# Altium PCB IntelliModule-Alpha.PcbDoc (part 2 of 2)
Units mm, origin at the board's own origin, x right, y up, seen from the top; angles counter-clockwise.
Board outline 30 x 26.8 mm, 4 copper layers (Top Layer, Layer 1, Layer 2, Bottom Layer), stack 1.006 mm thick; 64 components, 69 nets, 256 pads, 140 vias.
Unrouted connection lines stored in the file: 2.
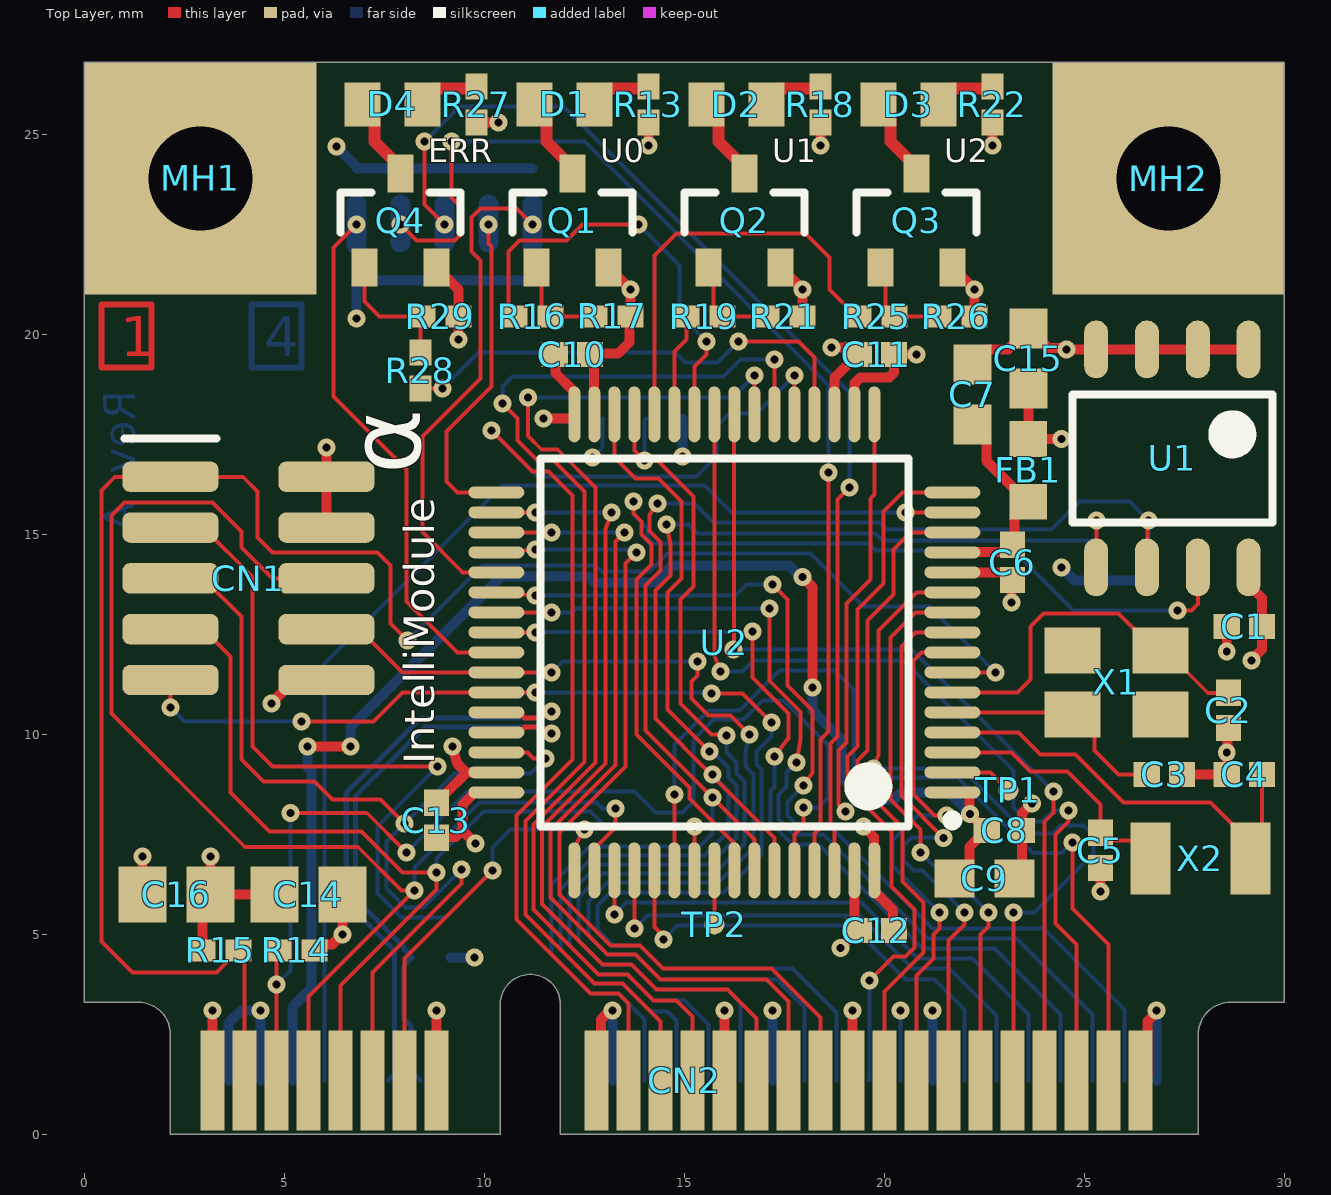
[diagram p0: Top Layer view]

## Via types
v1: diameter 0.45, hole 0.2, Top Layer to Bottom Layer, tented both sides, 140 vias

## Nets (pads, with @x,y where several pads share a name; then routed paths per layer and width w, separated by ;. In a path a pad name is that pad's centre, name@x,y a point inside that pad or via, vN(x,y) a via of type N, cw(c..) or ccw(c..) an arc to the next point about the centre after c; other vN are vias at no path point) (continued)
GND: (continued)
  Top Layer w0.25: C16.2 v1(1.45,6.95) ; CN2.1 v1(3.2,3.1) ; R14.1 5.8,4.6 5.95,4.75 6.2,4.75 v1(6.45,5) C14.2 ; CN1.4 CN1.2 v1(6.05,17.175) ; CN2.15 v1(8.8,3.1) ; C13.2 8.8,8.31 8.985,8.495 9.005,8.495 9.55,9.04 ; Q4.2 9.35,21.125 R29.2 v1(9.35,19.875) ; v1(9.2,9.7) 9.325,9.266 9.55,9.04 ; U2.47 9.55,9.04 ; C10.2 12.74,19.4 12.74,18.01 U2.31 ; C10.2@12.66,19.52 13.345,19.52 13.625,19.8 13.625,20.426 R17.2 v1(13.65,21.125) Q1.2 ; CN2.17 12.8,1.875 12.921,1.996 12.921,2.875 13.146,3.1 v1(13.2,3.1) ; CN2.25 v1(16,3.1) ; Q2.2 v1(17.95,21.125) R21.2 ; v1(18.9,4.66) 19.34,5.1 C12.2 19.26,5.2 19.26,6.59 U2.63 ; CN2.33 v1(19.2,3.1) ; U2.18 19.26,18.01 19.26,18.779 19.406,18.925 20.125,18.925 20.24,19.04 C11.2 v1(20.805,19.5) ; U2.12 21.71,14.04 23.02,14.04 C6.2 23.175,13.835 v1(23.175,13.3) ; Q3.2 v1(22.25,21.125) R26.2 ; C7.2 22.2,19.275 22.55,19.625 23.1,19.625 C15.2@23.6,20.125 ; C9.2 23.44,6.59 C8.2 23.44,8.025 v1(23.69,8.275) ; C15.2 C15.2@23.6,20.125 ; v1(25.4,6.075) C5.2 ; CN2.51 26.575,1.525 26.575,2.821 26.8,3.046 v1(26.8,3.1) ; C3.2 C4.2 v1(28.56,9.55) 28.58,9.57 28.58,10.14 C2.2 ; v1(28.56,12.075) C1.2 ; U1.1 U1.2 U1.3 U1.4 v1(24.55,19.625) 24.512,19.663 24.087,19.663 23.975,19.775 23.95,19.775 C15.2@23.6,20.125
  Bottom Layer w0.25: v1(6.3,24.7) 6.8,24.2 R8.2 R9.2 R10.2 R11.2 R12.2 ; CN2.18 v1(13.2,3.1) ; CN2.28 v1(17.2,3.1) ; CN2.38 v1(21.2,3.1) ; CN2.52 v1(26.8,3.1)
MCU_BOOT0: CN2.5 R14.2 U2.60 | length 28.6
  Top Layer w0.1: CN2.5 4.8,4.55 R14.2 ; v1(5.15,8.04) 7.06,8.04 v1(8.05,7.05) ; U2.60 17.75,7.5 17.975,7.725 v1(17.975,8.175)
  Bottom Layer w0.1: v1(4.8,3.75) 5.15,4.1 v1(5.15,8.04) ; v1(8.05,7.05) 9.575,8.575 13.75,8.575 14.275,8.05 14.95,8.05 15.225,8.325 15.225,9.875 15.725,10.375 16.475,10.375 16.95,10.85 17.475,10.85 18.6,9.725 18.6,8.425 18.35,8.175 v1(17.975,8.175)
MCU_PA0_GPIO0: CN2.35 U2.14 | length 16.4
  Top Layer w0.1: CN2.35 20,3.575 20.975,4.55 20.975,5.8 20.45,6.325 20.45,7.675 19.325,8.8 19.325,9.35 19.575,9.6 19.575,12.85 20.225,13.5 20.225,14.625 20.65,15.05 U2.14
MCU_PA1_AUX1: CN2.8 U2.15 | length 28.2
  Top Layer w0.1: v1(20.525,15.55) U2.15
  Bottom Layer w0.1: CN2.8 6,11.775 10.45,16.225 15.501,16.225 16.176,15.55 v1(20.525,15.55)
MCU_PA2_USART2_TX: CN2.34 U2.16 | length 17.9
  Top Layer w0.1: v1(19.625,3.85) 20.225,4.45 20.525,4.45 20.75,4.675 20.75,5.625 20.175,6.2 20.175,7.575 19.075,8.675 19.075,9.45 19.325,9.7 19.325,13.125 19.975,13.775 19.975,15.575 20.45,16.05 U2.16
  Bottom Layer w0.1: CN2.34 19.625,1.375 v1(19.625,3.85)
MCU_PA3_USART2_RX: CN2.36 U2.17 | length 19
  Top Layer w0.1: v1(19.025,8.075) 18.85,8.25 18.85,9.6 19.05,9.8 19.05,13.275 19.65,13.875 19.65,15.9 19.75,16 U2.17
  Layer 1 w0.1: v1(19.025,8.075) 19.3,8.35 19.875,8.35 20.2,8.025 20.2,7.475 20,7.275 20,5.675 20.7,4.975 20.7,4.225 20.4,3.925 v1(20.4,3.1)
  Bottom Layer w0.1: CN2.36 v1(20.4,3.1)
MCU_PA4_ERRORLED: R28.1 U2.20 | length 12.1
  Top Layer w0.1: R28.1 v1(8.95,18.65) ; v1(16.35,19.825) 17.85,19.825 18.25,19.425 U2.20
  Bottom Layer w0.1: v1(8.95,18.65) 9.85,19.55 14.775,19.55 15.025,19.3 15.825,19.3 v1(16.35,19.825)
MCU_PA5_SPI1_SCK: CN2.19 U2.21 | length 30
  Top Layer w0.1: v1(10.175,17.6) 11.208,16.567 11.608,16.567 12.2,15.975 12.2,9.375 10.8,7.975 10.8,5.375 12.65,3.525 13.35,3.525 13.6,3.275 CN2.19 ; U2.21 v1(17.75,18.975)
  Bottom Layer w0.1: v1(10.175,17.6) 11.325,16.45 15.3,16.45 15.8,16.95 15.8,17.7 16.125,18.025 16.8,18.025 v1(17.75,18.975)
MCU_PA6_SPI1_MISO: CN2.21 U2.22 | length 29.3
  Top Layer w0.1: v1(10.45,18.275) 10.825,17.9 10.825,17.35 11.325,16.85 11.725,16.85 12.5,16.075 12.5,9.306 11.025,7.831 11.025,5.5 12.75,3.775 13.45,3.775 14.4,2.825 CN2.21 ; U2.22 v1(17.25,19.375)
  Bottom Layer w0.1: v1(10.45,18.275) 10.45,18.7 10.7,18.95 15.975,18.95 16.4,19.375 v1(17.25,19.375)
MCU_PA7_SPI1_MOSI: CN2.23 U2.23 | length 27.9
  Top Layer w0.1: v1(11.087,18.425) 11.087,17.462 11.435,17.115 11.835,17.115 12.775,16.175 12.775,9.299 11.225,7.749 11.225,5.625 12.85,4 13.575,4 14.225,3.35 14.8,3.35 15.2,2.95 CN2.23 ; U2.23 v1(16.75,18.975)
  Bottom Layer w0.1: v1(11.087,18.425) 16.2,18.425 v1(16.75,18.975)
MCU_PA8_HWBIT0: R3.2 R8.1 U2.41 | length 14.2
  Top Layer w0.1: v1(6.8,22.75) 6.225,22.175 6.225,18.445 8.05,16.62 8.05,13.325 9.325,12.05 U2.41
  Bottom Layer w0.5: R3.2 v1(6.8,22.75) R8.1
MCU_PA9_USART1_TX: CN1.8 CN2.30 U2.42 | length 29.1
  Top Layer w0.1: CN1.8 6.87,12.63 7.95,11.55 U2.42 v1(11.675,11.55) ; v1(15.325,11.825) 15.325,11.475 15.175,11.325 15.175,10.9 15.6,10.475 16.15,10.475 v1(16.625,10)
  Bottom Layer w0.1: v1(11.675,11.55) 11.95,11.825 v1(15.325,11.825) ; v1(16.625,10) 16.525,9.575 16.525,9.2 16.725,9 16.725,7.175 15.85,6.3 13.075,6.3 12.6,5.825 12.6,4.975 13.075,4.5 13.775,4.5 14.4,3.875 17.3,3.875 18,3.175 CN2.30
MCU_PA10_USART1_RX: CN1.9 CN2.32 U2.43 | length 33.7
  Top Layer w0.1: v1(2.15,10.675) CN1.9 ; v1(5.425,10.325) 7.225,10.325 7.95,11.05 U2.43 v1(11.275,11.05) ; v1(15.676,11.026) 16.449,11.026 v1(17.175,10.3)
  Bottom Layer w0.1: v1(2.15,10.675) 2.5,10.325 v1(5.425,10.325) ; v1(11.275,11.05) 15.651,11.05 v1(15.676,11.026) ; v1(17.175,10.3) 17.175,9.95 16.8,9.575 16.8,9.25 16.925,9.125 16.925,7 15.975,6.05 13.15,6.05 12.825,5.725 12.825,5.125 13.225,4.725 13.896,4.725 14.471,4.15 17.7,4.15 18.8,3.05 CN2.32
MCU_PA13_JTAG_TMS_SWDIO: CN1.5 CN2.11 U2.46 | length 26.4
  Top Layer w0.1: CN1.5 2.97,13.9 3.925,12.945 3.925,9.375 4.475,8.825 5.75,8.825 6.199,8.376 7.399,8.376 v1(8,7.775) ; CN2.11 7.2,4.05 9.425,6.275 v1(9.425,6.625) ; U2.46 11.075,9.55 11.225,9.4 v1(11.525,9.4)
  Bottom Layer w0.1: v1(9.425,6.625) 8.475,5.675 8.025,5.675 7.55,6.15 7.55,7.325 v1(8,7.775) 9.25,9.025 11.15,9.025 v1(11.525,9.4)
MCU_PA14_JTAG_TCK_SWCLK: CN1.3 CN2.13 U2.49 | length 28.8
  Top Layer w0.1: CN1.3 2.97,15.17 4.2,13.94 4.2,9.7 4.7,9.2 v1(8.825,9.2) ; CN2.13 8,4.4 v1(10.2,6.6) ; U2.49@12.25,7.175 v1(12.5,7.625)
  Bottom Layer w0.1: v1(8.825,9.2) 7.325,7.7 7.325,6.025 7.925,5.425 9.025,5.425 v1(10.2,6.6) 10.2,7.175 10.65,7.625 v1(12.5,7.625)
MCU_PA15_JTAG_TDI: CN1.6 CN2.7 U2.50 | length 34.8
  Top Layer w0.1: CN2.7 5.6,3.45 v1(8.25,6.1) 7.925,6.1 6.835,7.19 4.01,7.19 0.675,10.525 0.675,15.475 1,15.8 3.201,15.8 3.925,15.076 3.925,14.675 4.7,13.9 CN1.6 ; U2.50 12.75,7.15 13.275,7.675 v1(13.275,8.15)
  Bottom Layer w0.1: v1(8.25,6.1) 8.25,6.675 9.875,8.3 12.8,8.3 12.95,8.15 v1(13.275,8.15)
MCU_PB0_USERLED_0: R16.1 U2.26 | length 10.8
  Top Layer w0.1: R16.1 10.6,20.6 10.6,22.075 10.875,22.35 12.05,22.35 12.45,22.75 v1(13.85,22.75) ; U2.26 15.25,19.2 15.55,19.5 v1(15.55,19.825)
  Bottom Layer w0.1: v1(13.85,22.75) 14.875,21.725 14.875,20.5 v1(15.55,19.825)
MCU_PB1_USERLED_1: R19.1 U2.27 | length 2.6
  Top Layer w0.1: U2.27 14.75,19.575 15.05,19.875 R19.1
MCU_PB2_USERLED_2: R25.1 U2.28 | length 10.6
  Top Layer w0.1: U2.28 14.25,21.975 14.8,22.525 18.025,22.525 18.625,21.925 18.625,21.125 19.3,20.45 R25.1
MCU_PB3_JTAG_TDO_TRACE_SWO: CN1.7 CN2.9 U2.55 | length 25.9
  Top Layer w0.1: CN1.7 2.97,12.63 3.65,11.95 3.65,8.55 4.625,7.575 6.925,7.575 7.95,6.55 v1(8.8,6.55) 8.8,6.12 6.4,3.72 CN2.9 ; U2.55 v1(15.25,7.7)
  Bottom Layer w0.1: v1(8.8,6.55) 8.8,6.9 9.975,8.075 12.65,8.075 13.025,7.7 v1(15.25,7.7)
MCU_PB4_JTAG_TRSTn: TP2.1 U2.56 | length 1.4
  Top Layer w0.1: TP2.1 U2.56
MCU_PB5_EEPROM_WP: U1.7 U2.57 | length 27.1
  Top Layer w0.1: v1(13.725,15.825) 13.725,15.525 13.925,15.325 13.925,15 14.175,14.75 14.175,14.25 13.8,13.875 13.8,10 15.125,8.675 15.125,8.4 16.25,7.275 U2.57 ; v1(27.325,13.1) 27.675,13.1 27.835,13.26 U1.7
  Bottom Layer w0.1: v1(13.725,15.825) 13.725,15.5 14.075,15.15 14.075,14.925 14.225,14.775 19.6,14.775 19.775,14.6 23.225,14.6 24.725,13.1 v1(27.325,13.1)
MCU_PB6_I2C1_SCL: CN2.20 R1.2 U1.6 U2.58 | length 37.2
  Top Layer w0.1: v1(14.325,15.775) 14.125,15.48 14.125,15.083 14.4,14.808 14.4,14.1 14.025,13.725 14.025,10.1 v1(15.7,8.425) 16.75,7.375 U2.58 ; U1.6 26.582,14.192 26.582,15.332 v1(26.6,15.35)
  Bottom Layer w0.1: CN2.20 14,2.875 13.35,3.525 12.65,3.525 11.675,4.5 11.675,6.25 12.625,7.2 15.375,7.2 15.7,7.525 v1(15.7,8.425) ; v1(14.325,15.775) 15.25,15.775 15.725,15.3 19.875,15.3 20.05,15.125 24.175,15.125 24.875,15.825 26.125,15.825 v1(26.6,15.35) R1.2
MCU_PB7_I2C1_SDA: CN2.22 R2.2 U1.5 U2.59 | length 35.8
  Top Layer w0.1: v1(14.55,15.25) 14.65,14.75 14.65,13.975 14.275,13.6 14.275,10.395 15.67,9 v1(15.7,9) 15.7,8.955 17.25,7.405 U2.59 ; U1.5 25.298,14.178 25.298,15.348 v1(25.3,15.35)
  Bottom Layer w0.1: v1(14.55,15.25) 15.1,15.25 15.325,15.025 19.775,15.025 19.95,14.85 25.2,14.85 R2.2 v1(25.3,15.35) ; CN2.22 14.8,2.85 14.575,3.075 14.15,3.075 13.45,3.775 12.75,3.775 11.9,4.625 11.9,6.125 12.75,6.975 15.5,6.975 16.1,7.575 16.1,8.6 v1(15.7,9)
MCU_PB8_HWBIT1: R4.2 R9.1 U2.61 | length 29.4
  Top Layer w0.1: v1(7.9,22.75) 8.3,22.35 9.25,22.35 9.425,22.525 9.425,23.175 9.175,23.425 v1(9.175,24.825) ; U2.61 18.25,7.525 18.4,7.675 18.4,9.875 18.6,10.075 v1(18.6,16.55)
  Bottom Layer w0.1: R4.2 R4.2@7.9,22.3 ; v1(9.175,24.825) 12.5,24.825 18.6,18.725 v1(18.6,16.55)
  Bottom Layer w0.5: R4.2@7.9,22.3 R9.1
MCU_PB9_HWBIT2: R5.2 R10.1 U2.62 | length 29.4
  Top Layer w0.1: v1(8.5,24.825) 8.5,23.25 v1(9,22.75) ; U2.62 18.75,7.625 18.65,7.725 18.65,8.23 18.65,9.775 18.825,9.95 18.825,15.875 v1(19.125,16.175)
  Bottom Layer w0.1: v1(8.5,24.825) 9.375,25.7 11.975,25.7 19.125,18.55 v1(19.125,16.175) ; R5.2 R5.2@9,22.3
  Bottom Layer w0.5: R5.2@9,22.3 R10.1
MCU_PB10_I2C2_SCL: CN2.26 R24.2 U2.29 | length 26
  Top Layer w0.1: U2.29 13.75,17.1 v1(14,16.85) 14.325,16.85 15.225,15.95 15.225,13.7 14.9,13.375 14.9,10.775 15.675,10 16.025,10 v1(16.05,9.975)
  Bottom Layer w0.1: v1(14,16.85) 14,17.85 R24.2 ; v1(16.05,9.975) 16.05,9.55 16.3,9.3 16.3,9.025 16.5,8.825 16.5,7.275 15.75,6.525 12.95,6.525 12.35,5.925 12.35,4.85 12.95,4.25 13.675,4.25 14.3,3.625 16.075,3.625 16.4,3.3 CN2.26
MCU_PB11_I2C2_SDA: CN2.24 R23.2 U2.30 | length 25.9
  Top Layer w0.1: v1(12.7,16.925) 13.25,16.925 ; U2.30 13.25,16.925 ; v1(15.625,9.575) 14.575,10.625 14.575,13.55 14.925,13.9 14.925,15.825 14.35,16.4 13.775,16.4 13.25,16.925
  Bottom Layer w0.1: v1(12.7,16.925) 12.95,17.175 R23.2 ; CN2.24 15.6,2.75 15,3.35 14.225,3.35 13.575,4 12.85,4 12.125,4.725 12.125,6.025 12.85,6.75 15.625,6.75 16.3,7.425 16.3,8.725 16.1,8.925 16.1,9.175 15.7,9.575 v1(15.625,9.575)
MCU_PB12_HWBIT3: R6.2 R11.1 U2.33 | length 9.2
  Top Layer w0.1: v1(10.1,22.75) 10.1,22.275 10.175,22.2 10.175,18.7 9.05,17.575 9.05,16.325 9.325,16.05 U2.33
  Bottom Layer w0.5: R6.2@10.1,22.3 R11.1
MCU_PB13_SPI2_SCK: CN2.27 U2.34 | length 21.4
  Top Layer w0.1: U2.34 v1(11.275,15.55) ; v1(13.175,15.55) 13.025,15.125 13.025,9.266 11.439,7.68 11.439,5.761 12.95,4.25 13.675,4.25 14.3,3.625 16.075,3.625 16.8,2.9 CN2.27
  Bottom Layer w0.1: v1(11.275,15.55) v1(13.175,15.55)
MCU_PB14_SPI2_MISO: CN2.29 U2.35 | length 22.1
  Top Layer w0.1: U2.35 v1(11.675,15.05) ; v1(13.5,15.05) 13.275,14.825 13.275,9.233 11.65,7.608 11.65,5.925 13.075,4.5 13.775,4.5 14.4,3.875 17.05,3.875 17.6,3.325 CN2.29
  Bottom Layer w0.1: v1(11.675,15.05) v1(13.5,15.05)
MCU_PB15_SPI2_MOSI: CN2.31 U2.36 | length 22.3
  Top Layer w0.1: U2.36 v1(11.275,14.625) ; v1(13.8,14.55) 13.525,14.275 13.525,9.2 11.875,7.55 11.875,6.001 13.151,4.725 13.896,4.725 14.471,4.15 17.175,4.15 18.4,2.925 CN2.31
  Bottom Layer w0.1: v1(11.275,14.625) 13.725,14.625 v1(13.8,14.55)
MCU_PC0_GPIO1: CN2.37 U2.8 | length 13.8
  Top Layer w0.1: CN2.37 20.8,3.975 21.225,4.4 21.225,5 21.375,5.15 v1(21.375,5.55) ; v1(21.55,7.975) 21.25,7.975 20.725,8.5 20.725,11.845 20.93,12.05 U2.8
  Bottom Layer w0.1: v1(21.375,5.55) 20.2,6.725 20.2,7.35 20.825,7.975 v1(21.55,7.975)
MCU_PC1_GPIO2: CN2.39 U2.9 | length 14.5
  Top Layer w0.1: v1(21.482,7.41) 20.425,8.467 20.425,12.2 20.775,12.55 U2.9 ; CN2.39 21.6,4.85 22,5.25 v1(22,5.55) v1@22.001,5.551
  Bottom Layer w0.1: v1(21.482,7.41) 21.467,7.425 20.675,7.425 20.475,7.225 20.475,6.85 20.725,6.6 20.95,6.6 v1(22,5.55)
MCU_PC2_GPIO3: CN2.41 U2.10 | length 14.1
  Top Layer w0.1: v1(20.9,7.05) 20.9,7.625 20.15,8.375 20.15,12.425 20.775,13.05 U2.10 ; CN2.41 22.4,5 22.6,5.2 v1(22.6,5.55)
  Bottom Layer w0.1: v1(20.9,7.05) 21.95,6 22.15,6 v1(22.6,5.55)
MCU_PC3_GPIO4: CN2.43 U2.11 | length 19.3
  Top Layer w0.1: v1(19.725,9.15) 19.85,9.475 19.85,12.595 20.805,13.55 U2.11 ; CN2.43 23.225,1.375 v1(23.225,5.55)
  Bottom Layer w0.1: v1(19.725,9.15) 21.925,9.15 23.55,7.525 24.2,7.525 24.4,7.725 24.975,7.725 25.225,7.475 25.225,7.025 23.75,5.55 v1(23.225,5.55)
MCU_PC4_GPIO5: CN2.45 U2.24 | length 22.7
  Top Layer w0.1: v1(16.225,12.125) 16.237,12.137 16.237,17.988 U2.24 ; CN2.45 24,7.815 24.225,8.04 v1(24.225,8.575)
  Bottom Layer w0.1: v1(16.225,12.125) 20.675,12.125 v1(24.225,8.575)
MCU_PC5_GPIO6: CN2.47 U2.25 | length 24.7
  Top Layer w0.1: U2.25 15.75,11.975 v1(15.901,11.576) ; v1(24.6,8.1) 24.6,7.825 24.275,7.5 24.275,5.275 24.8,4.75 CN2.47
  Bottom Layer w0.1: v1(15.901,11.576) 16.451,11.576 16.725,11.85 20.475,11.85 23.225,9.1 23.225,8.175 23.575,7.825 23.953,7.825 24.225,8.097 24.597,8.097 v1(24.6,8.1)
MCU_PC6_HWBIT4: R7.2 R12.1 U2.37 | length 13.8
  Top Layer w0.1: U2.37 9.46,14.05 8.45,15.06 8.45,17.45 9.9,18.9 9.9,21.85 9.675,22.075 9.675,22.925 9.9,23.15 10.8,23.15 v1(11.2,22.75)
  Bottom Layer w0.1: R12.1 R12.1@11.3,23.15
  Bottom Layer w0.5: R7.2 v1(11.2,22.75) R12.1
MCU_PC7_GPIO8: CN2.50 U2.38 | length 25.7
  Top Layer w0.1: U2.38 v1(11.275,13.475) ; v1(17.2,13.75) 17.575,13.375 17.575,11.225 18.2,10.6 18.2,9.03 v1(17.975,8.725)
  Bottom Layer w0.1: v1(11.275,13.475) 16.275,13.475 16.55,13.75 v1(17.2,13.75) ; v1(17.975,8.725) 17.575,8.325 17.575,7.975 17.8,7.75 18.6,7.75 21.2,5.15 23.975,5.15 26,3.125 CN2.50
MCU_PC8_GPIO9: CN2.48 U2.39 | length 24.2
  Top Layer w0.1: U2.39 v1(11.675,13.05) ; v1@17.125,13.15 v1(17.125,13.145) 17.125,11.34 17.9,10.565 17.9,9.875 v1(17.8,9.3)
  Bottom Layer w0.1: v1(11.675,13.05) 12.2,13.05 12.295,13.145 v1(17.125,13.145) ; v1(17.8,9.3) 17.55,9.05 17.55,8.7 17.35,8.5 17.35,7.884 17.734,7.5 18.475,7.5 21.075,4.9 23.3,4.9 25.2,3 CN2.48
MCU_PC9_GPIO10: CN2.46 U2.40 | length 22.7
  Top Layer w0.1: U2.40 v1(11.275,12.55) ; v1(16.7,12.575) 16.7,11.425 17.6,10.525 17.6,9.9 v1(17.25,9.443) 17.25,9.502 v1@17.226,9.526
  Bottom Layer w0.1: v1(11.275,12.55) 11.288,12.562 16.688,12.562 v1(16.7,12.575) ; v1(17.25,9.443) 17.25,8.683 17.15,8.583 17.15,7.8 17.7,7.25 18.35,7.25 20.95,4.65 22.75,4.65 24.4,3 CN2.46
MCU_PC10_GPIO11: CN2.44 U2.51 | length 14.4
  Top Layer w0.1: v1(13.25,5.5) U2.51
  Bottom Layer w0.1: v1(13.25,5.5) 13.55,5.8 19.425,5.8 20.825,4.4 22.2,4.4 23.6,3 CN2.44
MCU_PC11_GPIO12: CN2.42 U2.52 | length 13.3
  Top Layer w0.1: v1(13.75,5.15) U2.52
  Bottom Layer w0.1: v1(13.75,5.15) 14.075,5.475 19.375,5.475 20.7,4.15 21.625,4.15 22.8,2.975 CN2.42
MCU_PC12_GPIO13: CN2.40 U2.53 | length 12.1
  Top Layer w0.1: U2.53 14.25,5.18 14.475,4.955 v1(14.475,4.875)
  Bottom Layer w0.1: v1(14.475,4.875) 14.825,5.225 19.175,5.225 20.525,3.875 21.25,3.875 22,3.125 CN2.40
MCU_PC13_RTC_TAMPER: TP1.1 U2.2 | length 1.6
  Top Layer w0.1: U2.2 22.65,9.05 TP1.1
MCU_PD2_GPIO7: CN2.49 U2.54 | length 23.6
  Top Layer w0.1: U2.54 v1(14.75,8.5) ; v1(24.7,7.3) 24.7,5.65 25.6,4.75 CN2.49
  Bottom Layer w0.1: v1(14.75,8.5) 14.75,9.75 15.6,10.6 16.375,10.6 17.375,11.6 18.75,11.6 19.225,11.125 19.225,9.05 19.55,8.725 19.925,8.725 20.125,8.925 21.825,8.925 23.715,7.035 24.435,7.035 v1(24.7,7.3)
MCU_RESETn: CN1.1 CN2.3 R15.2 U2.7 | length 47.6
  Top Layer w0.1: CN2.3 4,4.45 R15.2 3.3,4.05 1.2,4.05 0.425,4.825 0.425,16.1 0.765,16.44 CN1.1 3.96,16.44 4.325,16.075 4.325,14.925 4.7,14.55 7.325,14.55 7.65,14.225 7.65,12.775 v1(8.075,12.35) ; U2.7 v1(22.775,11.55)
  Bottom Layer w0.1: v1(8.075,12.35) 9.95,14.225 12.775,14.225 12.925,14.075 14.125,14.075 14.575,14.525 18.15,14.525 19.475,13.2 21.125,13.2 v1(22.775,11.55)
MCU_USB_D_N: CN2.12 U2.44 | length 15.2
  Top Layer w0.127: U2.44 10.874,10.55 11.011,10.414 11.439,10.414 11.601,10.575 v1(11.675,10.575)
  Bottom Layer w0.127: CN2.12 7.75,1.5 7.75,4.6 6.548,5.802 6.548,8.548 8.414,10.414 11.439,10.414 11.601,10.575 v1(11.675,10.575)
MCU_USB_D_P: CN2.14 R20.2 U2.45 | length 15.1
  Top Layer w0.127: U2.45 10.874,10.05 11.011,10.186 11.439,10.186 11.601,10.025 v1(11.675,10.025)
  Bottom Layer w0.127: CN2.14 8.164,1.586 8.164,2.711 7.977,2.898 7.977,4.202 8.2,4.425 7.989,4.636 7.989,4.686 7.977,4.698 7.973,4.698 6.775,5.896 6.775,8.454 8.508,10.186 11.439,10.186 11.601,10.025 v1(11.675,10.025)
MCU_XTAL32_OSC_IN: C5.1 U2.3 X2.1 | length 6.5
  Top Layer w0.1: U2.3 23.175,9.55 23.65,9.075 24.575,9.075 25.4,8.25 C5.1 25.59,7.35 26.2,7.35 X2.1
MCU_XTAL32_OSC_OUT: C4.1 U2.4 X2.2 | length 11.2
  Top Layer w0.1: U2.4 23.35,10.05 23.9,9.5 24.775,9.5 25.975,8.3 28.15,8.3 29.15,7.3 X2.2 29.44,7.19 C4.1
MCU_XTAL_OSC_IN: C3.1 U2.5 X1.1 | length 5.7
  Top Layer w0.1: U2.5 24.65,10.55 X1.1 25.25,9.95 25.25,9.6 25.85,9 C3.1
MCU_XTAL_OSC_OUT: C2.1 U2.6 X1.3 | length 9.3
  Top Layer w0.1: U2.6 23.325,11.05 23.65,11.375 23.65,12.7 23.975,13.025 25.85,13.025 26.775,12.1 X1.3 27.025,12.1 28.085,11.04 C2.1
NetD1_1: D1.1 Q1.3 | length 2.1
  Top Layer w0.3: D1.1 11.55,25.45 11.55,24.825 12.2,24.175 Q1.3
NetD1_2: D1.2 R13.2 | length 1.6
  Top Layer w0.3: D1.2 12.75,25.85 13.05,26.15 14.05,26.15 R13.2
NetD2_1: D2.1 Q2.3 | length 2.1
  Top Layer w0.3: D2.1 15.85,25.45 15.85,24.825 16.5,24.175 Q2.3
NetD2_2: D2.2 R18.2 | length 1.6
  Top Layer w0.3: D2.2 17.05,25.85 17.35,26.15 18.35,26.15 R18.2
NetD3_1: D3.1 Q3.3 | length 2.1
  Top Layer w0.3: D3.1 20.15,25.45 20.15,24.825 20.8,24.175 Q3.3
NetD3_2: D3.2 R22.2 | length 1.6
  Top Layer w0.3: D3.2 21.35,25.85 21.65,26.15 22.65,26.15 R22.2
NetD4_1: D4.1 Q4.3 | length 2.1
  Top Layer w0.3: D4.1 7.25,25.45 7.25,24.825 7.9,24.175 Q4.3
NetD4_2: D4.2 R27.2 | length 1.6
  Top Layer w0.3: D4.2 8.45,25.85 8.75,26.15 9.75,26.15 R27.2
NetQ1_1: Q1.1 R16.2 R17.1 | length 2.5
  Top Layer w0.1: Q1.1 11.425,21.55 11.425,20.675 R16.2 R17.1
NetQ2_1: Q2.1 R19.2 R21.1 | length 2.5
  Top Layer w0.1: Q2.1 15.725,21.55 15.725,20.675 R19.2 R21.1
NetQ3_1: Q3.1 R25.2 R26.1 | length 2.5
  Top Layer w0.1: Q3.1 20.025,21.55 20.025,20.675 R25.2 R26.1
NetQ4_1: Q4.1 R28.2 R29.1 | length 3.4
  Top Layer w0.1: Q4.1 7,20.825 7.375,20.45 R29.1 8.4,20.4 R28.2
VBAT_MCU: C8.1 C9.1 CN2.6 U2.1 | length 35.6
  Top Layer w0.25: v1(5.575,9.7) v1(6.65,9.7) ; v1(17.95,13.94) 18.2,13.69 v1(18.2,11.175) ; U2.1 22.102,8.55 22.125,8.527 22.125,8.015 v1@22.145,7.995 ; C9.1 21.775,6.4 22.125,6.75 22.125,7.185 C8.1@22.54,7.6 ; v1(22.145,8.015) v1@22.145,7.995 ; C8.1 C8.1@22.54,7.6 ; v1@22.145,7.995 C8.1@22.54,7.6
  Bottom Layer w0.25: CN2.6 5.2,3.175 5.675,3.65 5.675,9.084 5.575,9.184 v1(5.575,9.7) ; v1(6.65,9.7) 6.65,10.175 10.425,13.95 12.6,13.95 12.75,13.8 14.275,13.8 14.7,14.225 17.611,14.225 17.896,13.94 v1(17.95,13.94) ; v1(18.2,11.175) 18.2,10.6 18.925,9.875 18.925,8.925 19.475,8.375 20.25,8.375 20.425,8.55 21.611,8.55 22.145,8.016 v1(22.145,8.015)
pads on no net: X1.2 X1.4
copper on no net: | length 22.6
  Top Layer w0.15: 0.425,19.175 1.675,19.175 1.675,20.75 0.425,20.75 0.425,19.175
  Layer 1 w0.15: 1.675,19.175 1.675,20.75 2.925,20.75 2.925,19.175 1.675,19.175
  Layer 2 w0.15: 2.925,19.175 2.925,20.75 4.175,20.75 4.175,19.175 2.925,19.175
  Bottom Layer w0.15: 4.175,19.175 4.175,20.75 5.425,20.75 5.425,19.175 4.175,19.175

## Polygon pours and split planes (outlines as drawn)
GND on Layer 2 "GND_L03_P000" (solid, remove dead copper, pour order 0): 0,2.5 0,26.8 30,26.8 30,2.5
3V3 on Layer 1 "3V3_L02_P002" (solid, remove dead copper, pour order 2): 0,2.5 0,26.8 30,26.8 30,2.5

## Other copper
Top Layer:
  text "1" at 0.9,19.45 h1
Layer 1:
  pour cut-out: 0,19 5.625,19 5.625,20.998 0.002,20.998 0,21
  text "2" at 1.975,19.45 h1
Layer 2:
  pour cut-out: 0,19 5.625,19 5.625,20.998 0.002,20.998 0,21
  text "3" at 3.225,19.45 h1
Bottom Layer:
  text "4" at 4.5,19.45 h1
  text "Rev. A" at 1.275,18.6 h0.8 r90

## Silkscreen, mask and mechanical layers (free items; w line width, h text height)
Top Overlay:
  lines w0.2: 1,17.4 3.3,17.4
  text "ERR" at 8.6,24.1 h1
  text "U0" at 12.9,24.1 h1
  text "U1" at 17.2,24.1 h1
  text "U2" at 21.5,24.1 h1
  text "α" at 9,16.5 h3.1 r90
  text "IntelliModule" at 9,9.25 h1.3 r90
Bottom Overlay:
  text "HW-Bits" at 11.5,24.9 h0.8
  text "0" at 12.4,23.3 h0.8
  text "1" at 12.2,21.4 h0.8
  text "0" at 7.1,19.7 h0.8
  text "1" at 8,19.7 h0.8
  text "2" at 9.3,19.7 h0.8
  text "3" at 10.4,19.7 h0.8
  text "4" at 11.5,19.7 h0.8
Top Solder:
  rectangle: 0.25,19 5.6,20.925
  rectangle: 1.9,0 28.1,2.7
Bottom Solder:
  rectangle: 0.25,19 5.6,20.925
  rectangle: 1.9,0 28.1,2.7
Mechanical 1:
  lines w0.2: 10.4,0 10.4,0 ; 27.85,0 27.85,0
Board:
  the board outline again, w0.2

## Dimensions
2.15,0 to 0,26.8 on Mechanical 1
2.15,0 to 2.9,23.9 on Mechanical 1
0,3.3 to 30,3.3 on Mechanical 1

## Text inside footprints (layer, text, board x,y; h text height)
TP1: Top Assembly "TP" at 23.25,8.35 h0.3 r90
TP2: Top Assembly "TP" at 15.9,5 h0.3 r90